# Altium PCB JWpulsegen-V2.PcbDoc
Units mm, origin at the board's own origin, x right, y up, seen from the top; angles counter-clockwise.
Board outline 66.14 x 42.58 mm, 2 copper layers (Top Layer, Bottom Layer), stack 1.646 mm thick; 26 components, 13 nets, 68 pads, 168 vias.
Unrouted connection lines stored in the file: 163.
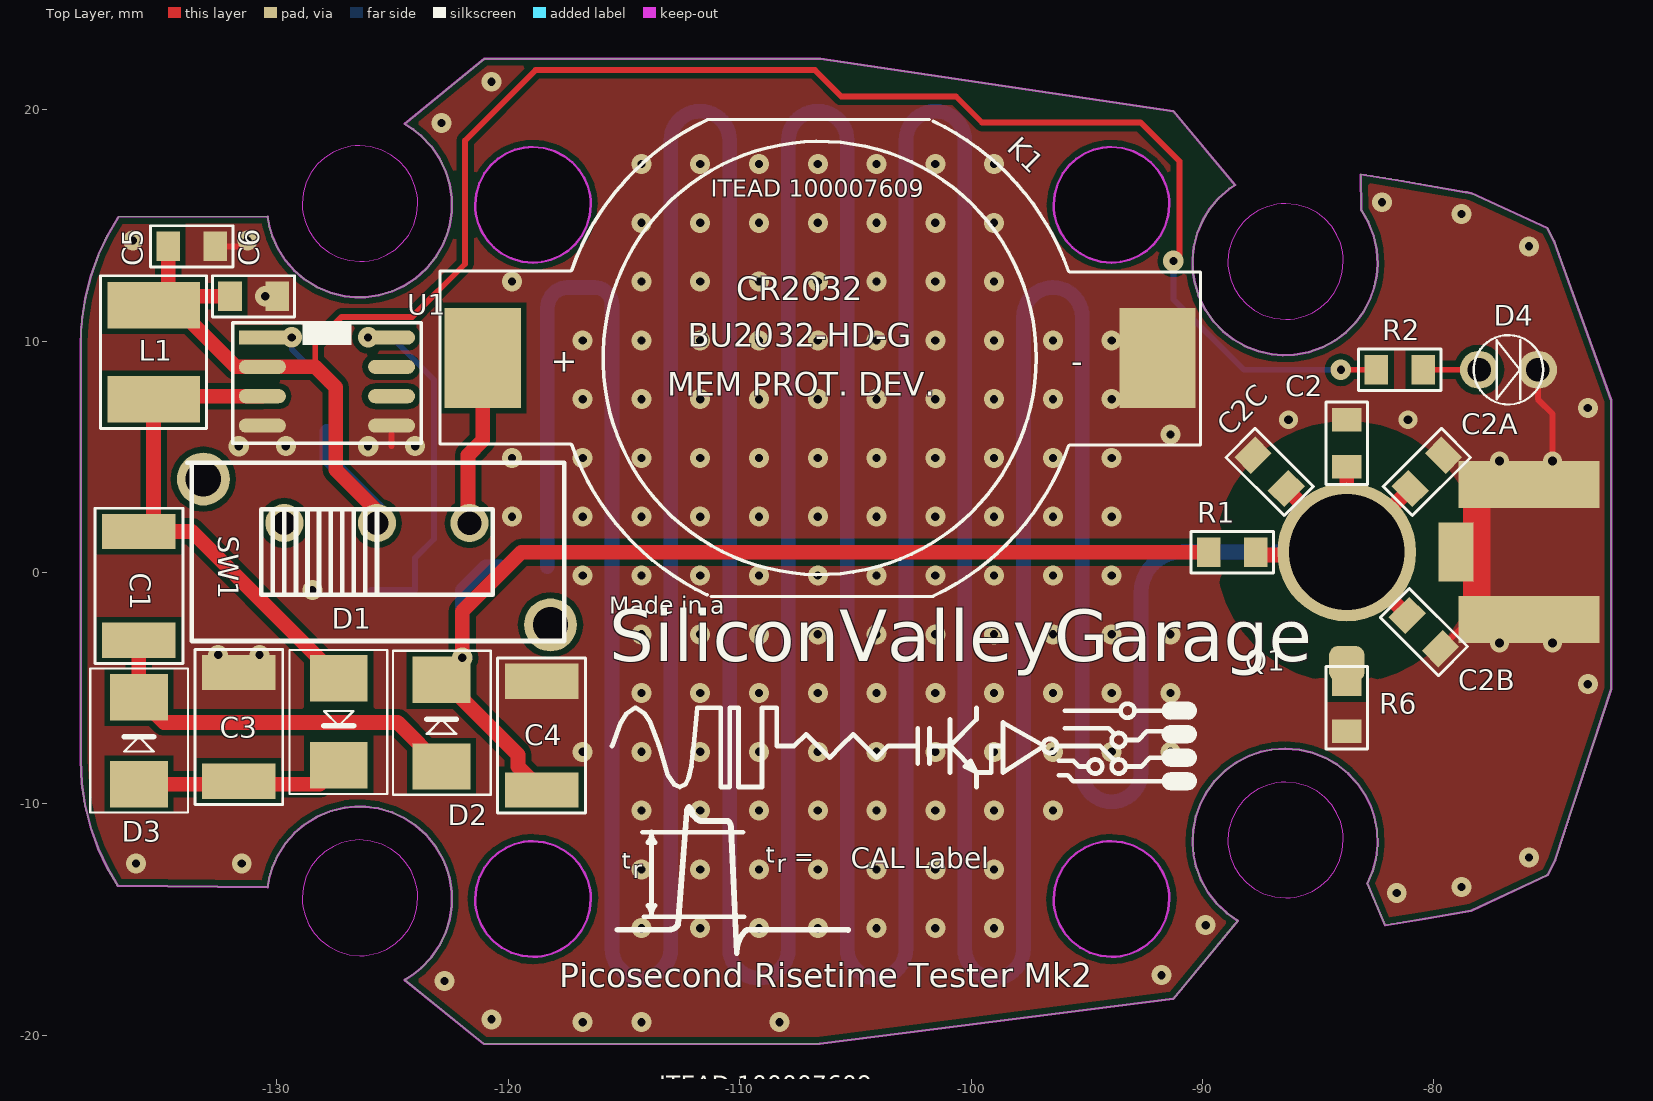
[diagram p0: Top Layer view]
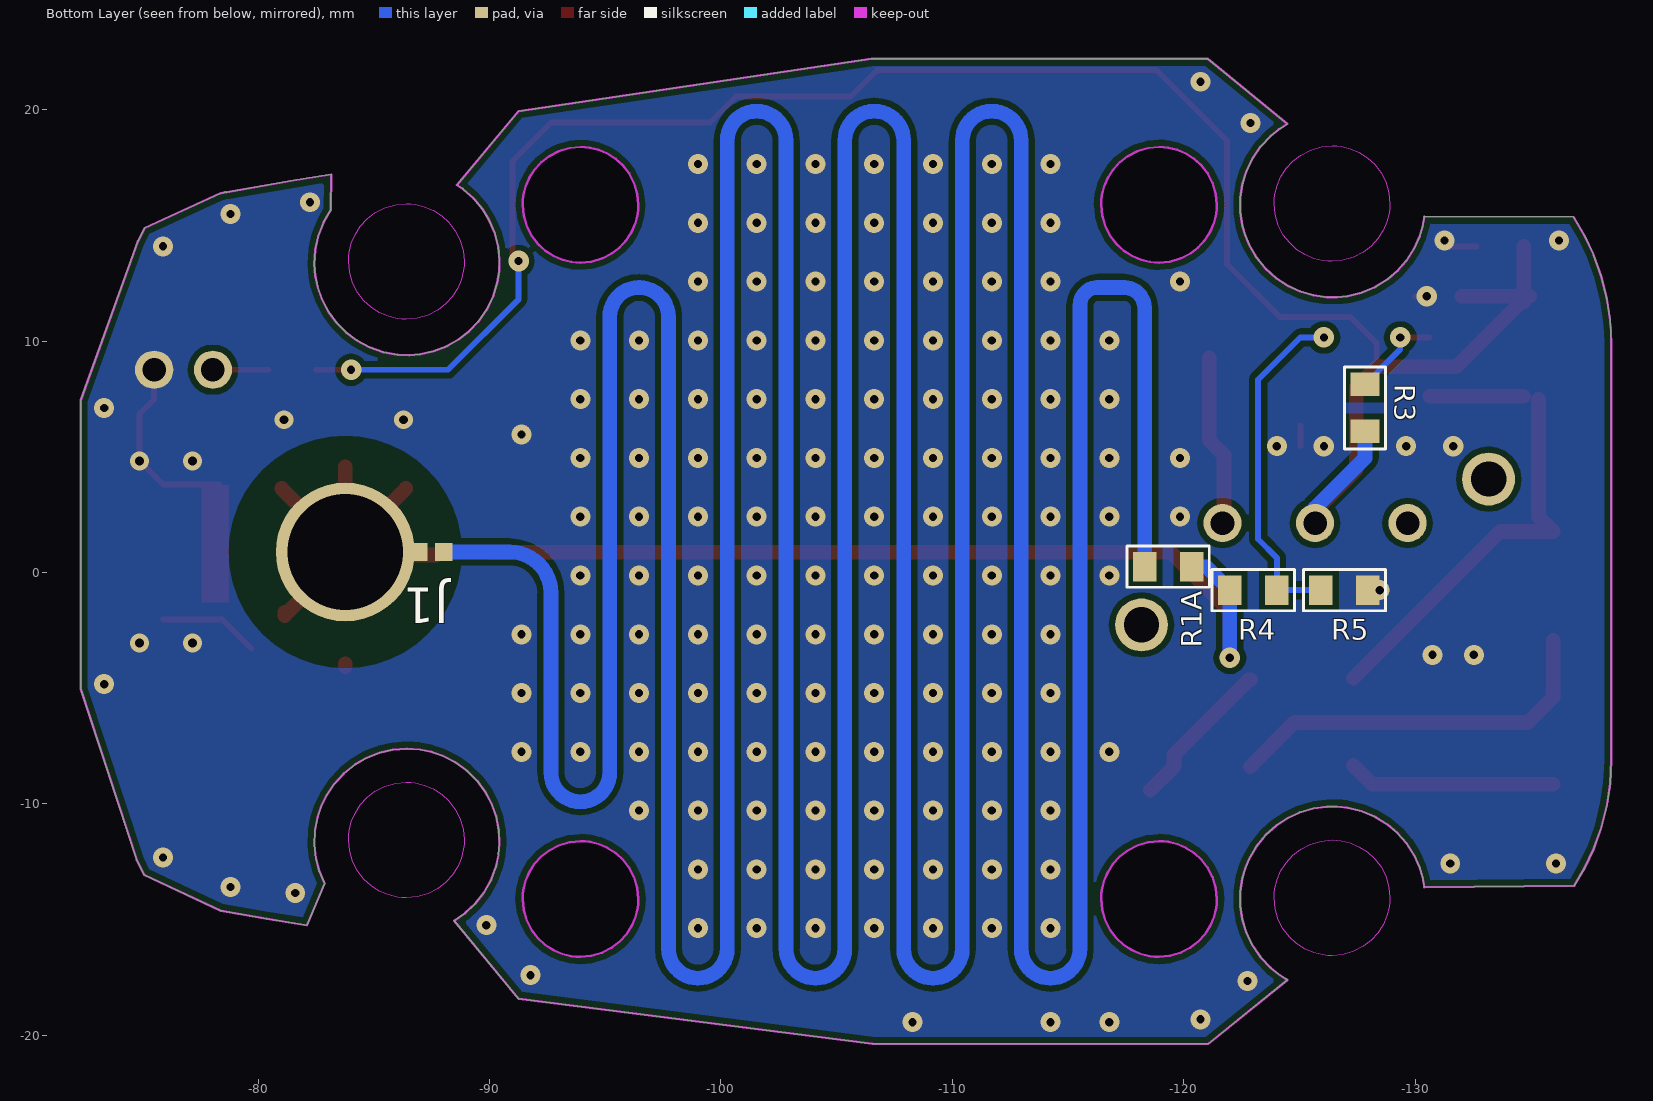
[diagram p1: Bottom Layer view, seen from below]

## Layer stack, top to bottom
Top Solder: solder mask 0.0102, Solder Resist, Dk 3.5
Top Layer: signal copper 0.0356
Dielectric1: core 1.5748, FR-4, Dk 4.8
Bottom Layer: signal copper 0.0356
Bottom Solder: solder mask 0.0102, Solder Resist, Dk 3.5

## Board outline
-124.485,-17.6 -124.116,-17.366 -123.765,-17.085 -123.332,-16.63 -122.973,-16.109 -122.699,-15.533 -122.533,-14.982 -122.448,-14.408 -122.448,-13.8 -122.536,-13.22 -122.656,-12.801 -122.827,-12.384 -123.141,-11.84 -123.54,-11.349 -124.015,-10.924 -124.498,-10.609 -125.023,-10.366 -125.608,-10.195 -126.188,-10.115 -126.625,-10.112 -127.072,-10.159 -127.683,-10.307 -128.267,-10.551 -128.808,-10.887 -129.247,-11.261 -129.628,-11.697 -129.957,-12.21 -130.197,-12.745 -130.323,-13.162 -130.404,-13.605 -136.876,-13.537 -137.333,-12.756 -137.718,-11.936 -138.056,-10.989 -138.297,-10.015 -138.429,-9.115 -138.48,-8.109 -138.48,9.894 -138.466,10.406 -138.426,10.918 -138.291,11.819 -138.047,12.8 -137.71,13.741 -137.325,14.556 -136.866,15.337 -136.844,15.367 -130.404,15.389 -130.323,14.947 -130.197,14.529 -129.957,13.994 -129.628,13.482 -129.247,13.046 -128.808,12.672 -128.267,12.336 -127.683,12.092 -127.072,11.943 -126.625,11.897 -126.189,11.9 -125.608,11.979 -125.024,12.15 -124.498,12.393 -124.015,12.708 -123.54,13.133 -123.141,13.624 -122.827,14.169 -122.656,14.585 -122.536,15.004 -122.448,15.584 -122.448,16.193 -122.533,16.766 -122.699,17.318 -122.973,17.893 -123.331,18.414 -123.765,18.87 -124.116,19.151 -124.485,19.384 -121.031,22.205 -106.51,22.199 -91.262,19.939 -88.595,16.745 -88.854,16.579 -89.328,16.156 -89.694,15.713 -89.995,15.219 -90.222,14.684 -90.375,14.089 -90.435,13.503 -90.419,13.023 -90.342,12.53 -90.159,11.93 -89.883,11.362 -89.518,10.842 -89.12,10.427 -88.665,10.071 -88.16,9.783 -87.586,9.561 -87.012,9.434 -86.533,9.393 -86.034,9.413 -85.417,9.524 -84.821,9.733 -84.262,10.035 -83.803,10.381 -83.397,10.792 -83.052,11.26 -82.765,11.804 -82.572,12.36 -82.476,12.831 -82.437,13.328 -82.476,13.955 -82.614,14.571 -82.849,15.161 -83.139,15.657 -83.163,17.204 -81.419,16.921 -78.636,16.44 -78.567,16.428 -78.499,16.415 -78.39,16.396 -75.103,14.888 -74.809,14.315 -72.339,7.445 -72.339,-5.027 -74.767,-12.43 -75.08,-13.064 -78.39,-14.611 -78.458,-14.623 -78.526,-14.636 -78.636,-14.655 -80.374,-14.96 -82.116,-15.251 -82.877,-13.433 -82.652,-12.903 -82.505,-12.344 -82.439,-11.767 -82.462,-11.152 -82.572,-10.574 -82.724,-10.118 -82.938,-9.667 -83.285,-9.144 -83.712,-8.679 -84.21,-8.285 -84.709,-8 -85.247,-7.789 -85.813,-7.657 -86.426,-7.608 -87.013,-7.65 -87.484,-7.747 -87.956,-7.908 -88.516,-8.191 -89.028,-8.561 -89.477,-9.01 -89.819,-9.472 -90.091,-9.982 -90.288,-10.529 -90.408,-11.133 -90.435,-11.72 -90.392,-12.199 -90.288,-12.687 -90.072,-13.276 -89.764,-13.827 -89.371,-14.326 -88.951,-14.719 -88.476,-15.049 -91.262,-18.415 -106.541,-20.359 -121.056,-20.371
cut-out: -93.936,13.392 -93.742,13.4 -93.543,13.423 -93.156,13.517 -92.775,13.678 -92.417,13.907 -92.1,14.196 -91.837,14.534 -91.622,14.948 -91.48,15.425 -91.436,15.892 -91.444,16.087 -91.467,16.285 -91.561,16.673 -91.722,17.054 -91.951,17.412 -92.24,17.729 -92.578,17.991 -92.992,18.207 -93.469,18.348 -93.936,18.392 -94.131,18.385 -94.329,18.361 -94.717,18.267 -95.098,18.106 -95.456,17.878 -95.773,17.588 -96.035,17.25 -96.251,16.837 -96.392,16.359 -96.436,15.892 -96.429,15.698 -96.405,15.499 -96.311,15.112 -96.15,14.731 -95.922,14.373 -95.632,14.056 -95.294,13.793 -94.881,13.578 -94.403,13.436
cut-out: -118.936,13.392 -118.742,13.4 -118.543,13.423 -118.156,13.517 -117.775,13.678 -117.417,13.907 -117.1,14.196 -116.837,14.534 -116.622,14.948 -116.48,15.425 -116.436,15.892 -116.444,16.087 -116.467,16.285 -116.561,16.673 -116.722,17.054 -116.951,17.412 -117.24,17.729 -117.578,17.991 -117.992,18.207 -118.469,18.348 -118.936,18.392 -119.131,18.385 -119.329,18.361 -119.717,18.267 -120.098,18.106 -120.456,17.878 -120.773,17.588 -121.035,17.25 -121.251,16.837 -121.392,16.359 -121.436,15.892 -121.429,15.698 -121.405,15.499 -121.311,15.112 -121.15,14.731 -120.922,14.373 -120.632,14.056 -120.294,13.793 -119.881,13.578 -119.403,13.436
cut-out: -118.936,-16.608 -118.742,-16.6 -118.543,-16.577 -118.156,-16.483 -117.775,-16.322 -117.417,-16.093 -117.1,-15.804 -116.837,-15.466 -116.622,-15.052 -116.48,-14.575 -116.436,-14.108 -116.444,-13.913 -116.467,-13.715 -116.561,-13.327 -116.722,-12.946 -116.951,-12.588 -117.24,-12.271 -117.578,-12.009 -117.992,-11.793 -118.469,-11.652 -118.936,-11.608 -119.131,-11.615 -119.329,-11.639 -119.717,-11.733 -120.098,-11.894 -120.456,-12.122 -120.773,-12.412 -121.035,-12.75 -121.251,-13.163 -121.392,-13.641 -121.436,-14.108 -121.429,-14.302 -121.405,-14.501 -121.311,-14.888 -121.15,-15.269 -120.922,-15.627 -120.632,-15.944 -120.294,-16.207 -119.881,-16.422 -119.403,-16.564
cut-out: -93.936,-16.608 -93.742,-16.6 -93.543,-16.577 -93.156,-16.483 -92.775,-16.322 -92.417,-16.093 -92.1,-15.804 -91.837,-15.466 -91.622,-15.052 -91.48,-14.575 -91.436,-14.108 -91.444,-13.913 -91.467,-13.715 -91.561,-13.327 -91.722,-12.946 -91.951,-12.588 -92.24,-12.271 -92.578,-12.009 -92.992,-11.793 -93.469,-11.652 -93.936,-11.608 -94.131,-11.615 -94.329,-11.639 -94.717,-11.733 -95.098,-11.894 -95.456,-12.122 -95.773,-12.412 -96.035,-12.75 -96.251,-13.163 -96.392,-13.641 -96.436,-14.108 -96.429,-14.302 -96.405,-14.501 -96.311,-14.888 -96.15,-15.269 -95.922,-15.627 -95.632,-15.944 -95.294,-16.207 -94.881,-16.422 -94.403,-16.564
cut-out: -86.411,-14.057 -86.217,-14.049 -86.018,-14.026 -85.631,-13.932 -85.25,-13.771 -84.892,-13.542 -84.574,-13.253 -84.312,-12.915 -84.096,-12.501 -83.955,-12.024 -83.911,-11.557 -83.919,-11.363 -83.942,-11.164 -84.036,-10.777 -84.197,-10.395 -84.426,-10.038 -84.715,-9.72 -85.053,-9.458 -85.467,-9.242 -85.944,-9.101 -86.411,-9.057 -86.606,-9.064 -86.804,-9.088 -87.191,-9.182 -87.573,-9.343 -87.931,-9.572 -88.248,-9.861 -88.51,-10.199 -88.726,-10.612 -88.867,-11.09 -88.911,-11.557 -88.904,-11.751 -88.88,-11.95 -88.786,-12.337 -88.625,-12.718 -88.396,-13.076 -88.107,-13.394 -87.769,-13.656 -87.356,-13.872 -86.878,-14.013
cut-out: -126.411,13.443 -126.217,13.451 -126.018,13.474 -125.631,13.568 -125.25,13.729 -124.892,13.958 -124.574,14.247 -124.312,14.585 -124.096,14.999 -123.955,15.476 -123.911,15.943 -123.919,16.137 -123.942,16.336 -124.036,16.723 -124.197,17.105 -124.426,17.462 -124.715,17.78 -125.053,18.042 -125.467,18.258 -125.944,18.399 -126.411,18.443 -126.606,18.436 -126.804,18.412 -127.191,18.318 -127.573,18.157 -127.931,17.928 -128.248,17.639 -128.51,17.301 -128.726,16.888 -128.867,16.41 -128.911,15.943 -128.904,15.749 -128.88,15.55 -128.786,15.163 -128.625,14.782 -128.396,14.424 -128.107,14.106 -127.769,13.844 -127.356,13.628 -126.878,13.487
cut-out: -86.411,10.943 -86.217,10.951 -86.018,10.974 -85.631,11.068 -85.25,11.229 -84.892,11.458 -84.574,11.747 -84.312,12.085 -84.096,12.499 -83.955,12.976 -83.911,13.443 -83.919,13.637 -83.942,13.836 -84.036,14.223 -84.197,14.605 -84.426,14.963 -84.715,15.28 -85.053,15.542 -85.467,15.758 -85.944,15.899 -86.411,15.943 -86.606,15.936 -86.804,15.912 -87.191,15.818 -87.573,15.657 -87.931,15.428 -88.248,15.139 -88.51,14.801 -88.726,14.388 -88.867,13.91 -88.911,13.443 -88.904,13.249 -88.88,13.05 -88.786,12.663 -88.625,12.282 -88.396,11.924 -88.107,11.606 -87.769,11.344 -87.356,11.128 -86.878,10.987
cut-out: -126.411,-16.557 -126.217,-16.549 -126.018,-16.526 -125.631,-16.432 -125.25,-16.271 -124.892,-16.042 -124.574,-15.753 -124.312,-15.415 -124.096,-15.001 -123.955,-14.524 -123.911,-14.057 -123.919,-13.863 -123.942,-13.664 -124.036,-13.277 -124.197,-12.895 -124.426,-12.538 -124.715,-12.22 -125.053,-11.958 -125.467,-11.742 -125.944,-11.601 -126.411,-11.557 -126.606,-11.564 -126.804,-11.588 -127.191,-11.682 -127.573,-11.843 -127.931,-12.072 -128.248,-12.361 -128.51,-12.699 -128.726,-13.112 -128.867,-13.59 -128.911,-14.057 -128.904,-14.251 -128.88,-14.45 -128.786,-14.837 -128.625,-15.218 -128.396,-15.576 -128.107,-15.894 -127.769,-16.156 -127.356,-16.372 -126.878,-16.513

## Design rules (kind name [scope] priority, off if disabled: settings)
AssemblyTestPointUsage [All] p1 off:
AssemblyTestpoint [All] p1 off: testpointundercomponent=TRUE minsize=1.016 maxsize=2.54 preferedsize=1.524 minholesize=0 maxholesize=1.016 preferedholesize=0.813 testpointgrid=0.025 usegrid=TRUE gridtolerance=0 allowsidetop=TRUE allowsidebottom=TRUE
Clearance Clearance_2 [All] p1: gap=0.254 ignorepadtopadclearanceinfootprint=FALSE
Clearance Clearance_1 [InPolygon] p2: gap=0.203 ignorepadtopadclearanceinfootprint=FALSE
Clearance waveguide [InNet('NetC1_1') vs InNet('GND')] p3: gap=0.203 ignorepadtopadclearanceinfootprint=FALSE
ComponentClearance [All] p1 off: gap=0.254 collisioncheckmode=3 verticalgap=0.254 showdistances=FALSE
DiffPairsRouting [All] p1 off: maxlimit=0.254 minlimit=0.254 mostfreqgap=0.254 toplayer_minwidth=0.381 toplayer_maxwidth=0.381 toplayer_prefwidth=0.381 bottomlayer_minwidth=0.381 bottomlayer_maxwidth=0.381 bottomlayer_prefwidth=0.381 maxuncoupledlength=12.7
FabricationTestPointUsage [All] p1 off: valid=0 allowmultiple=FALSE
FabricationTestpoint [All] p1 off: side=3 testpointundercomponent=TRUE minsize=1.016 maxsize=2.54 preferedsize=1.524 minholesize=0 maxholesize=1.016 preferedholesize=0.813 testpointgrid=0.025 allowsidetop=TRUE allowsidebottom=TRUE usegrid=TRUE gridtolerance=0
FanoutControl Fanout_BGA [IsBGA] p1 off: bgadir=Out bgaviamode=Centered fanoutstyle=Auto fanoutdirection=Alternating viagrid=0.025 // Fanout_BGA (Default Rule)
FanoutControl Fanout_LCC [IsLCC] p2 off: bgadir=Out bgaviamode=Centered fanoutstyle=Auto fanoutdirection=Alternating viagrid=0.025 // Fanout_LCC (Default Rule)
FanoutControl Fanout_SOIC [IsSOIC] p3 off: bgadir=Out bgaviamode=Centered fanoutstyle=Auto fanoutdirection=Alternating viagrid=0.025 // Fanout_SOIC (Default Rule)
FanoutControl Fanout_Small [(CompPinCount < 5)] p4 off: bgadir=Out bgaviamode=Centered fanoutstyle=Auto fanoutdirection=OutThenIn viagrid=0.025 // Fanout_Small (Default Rule)
FanoutControl Fanout_Default [All] p5 off: bgadir=Out bgaviamode=Centered fanoutstyle=Auto fanoutdirection=Alternating viagrid=0.025 // Fanout_Default (Default Rule)
Height [All] p1 off: minheight=0 maxheight=25.4 prefheight=12.7
HoleSize [All] p1 off: absolutevalues=TRUE maxlimit=2.54 minlimit=0.025 maxpercent=80.000 minpercent=20.000
HoleToHoleClearance [All] p1 off: gap=0.254 allowstackedmicrovias=TRUE
LayerPairs [All] p1 off: enforce=TRUE
MinimumSolderMaskSliver [All] p1 off: minsoldermaskwidth=0.254
NetAntennae [All] p1 off: netantennaetolerance=0
PasteMaskExpansion [All] p1 off: expansion=0
PlaneClearance [All] p1 off: clearance=0.508
PlaneConnect [All] p1 off: planeconnectstyle=Relief reliefexpansion=0.508 reliefentries=4 reliefconductorwidth=0.254 reliefairgap=0.254
PolygonConnect [All] p1: connectstyle=Direct reliefconductorwidth=0.254 reliefentries=4 polygonreliefangle="90 Angle" airgapwidth=0.254
RoutingCorners [All] p1 off: cornerstyle=45-Degree minsetback=2.54 maxsetback=2.54
RoutingLayers [All] p1 off: top layer_v5=TRUE bottom layer_v5=TRUE
RoutingPriority [All] p1 off: routingpriority=0
RoutingTopology [All] p1 off: topology=Shortest
RoutingVias [All] p1: holewidth=0.356 width=0.889 viastyle="Through Hole" minholewidth=0.356 minwidth=0.889 maxholewidth=0.711 maxwidth=1.27
SilkToSilkClearance [All] p1 off: silktosilkclearance=0.254
SilkToSolderMaskClearance SilkscreenOverComponentPads [IsPad] p1 off: minsilkscreentomaskgap=0.254 clearancetoexposedcopper=TRUE
SolderMaskExpansion [All] p1 off: expansion=0.102 istentingtop=FALSE
Width [All] p1: maxlimit=2.54 minlimit=0.254 preferedwidth=0.254 minimp=50.000000 maximp=50.000000 favimp=50.000000
4 further rules are at their usual default settings.

## Components (designator, comment, footprint, x,y, rotation, side; value= is the part's Value field where it differs from the comment)
C1 "470nF" 1812C-GENERIC -135.966,1.778 r270 top
C2 "2pF" 0805C-GENERIC -83.769,4.826 r90 top
C2A "2pF" 0805C-GENERIC -80.848,3.81 r45 top
C2B "2pF" 0805C-GENERIC -80.975,-2.032 r315 top
C2C "2pF" 0805C-GENERIC -86.563,3.81 r135 top
C3 "470nF" 1812C-GENERIC -131.648,-4.318 r270 top
C4 "470nF" 1812C-GENERIC -118.567,-4.699 r270 top
C5 "10uF" 0805C-GENERIC -134.442,14.097 r0 top
C6 "10uF" 0805C-GENERIC -131.775,11.938 r0 top
D1 "MURS120" DIODE-SMB -127.33,-4.572 r90 top
D2 "MURS120" DIODE-SMB -122.885,-8.382 r270 top
D3 "MURS120" DIODE-SMB -135.966,-9.144 r270 top
D4 "LED-YELLOW-3MM" LED-3MM-YELLOW -78.054,8.763 r0 top
J1 "BYPASS" BYPASS -88.413,0.889 r0 bottom
K1 "3V-CR2023" BATCLIP-CR2032 -121.107,9.271 r0 top
L1 "150uH" TOKO-NR4018 -135.331,11.557 r270 top
Q1 "2N2369-JW" JW2N2369 -81.991,0 r0 top
R1 "10M" 0805R-TBD -89.477,0.876 r0 top
R1A "10M" 0805R-TBD -120.091,0.254 r0 bottom
R2 "220R" 0805R-220 -82.245,8.763 r0 top
R3 "220R" 0805R-220 -127.838,6.35 r90 bottom
R4 "10M" 0805R-TBD -122.25,-0.762 r180 bottom
R5 "10K" 0805R-10K -125.933,-0.762 r180 bottom
R6 "10K" 0805R-10K -83.769,-4.826 r270 top
SW1 "SW-MHS122K" MHS122K -125.679,0.889 r180 top
U1 "LT1073" SO8 -130.632,10.16 r0 top

## Footprints (in the part's own frame and the unit in brackets; to place one, negate y for a bottom-side part, rotate by r counter-clockwise, add the part's x,y. Pads: shape width x height; smd on the part's side, far side on the other; paste and mask are expansions set on the pad)
0805C-GENERIC [mil] "CAPACITOR 0805"
  rect 40x50 smd: 1(-10,0) 2(70,0)
  silkscreen extent -40,-35 100,35, body extent -11,-25 70,25, height 26
0805R-10K [mil] "RESISTOR 0805"
  rect 40x50 smd: 1(0,0) 2(80,0)
  silkscreen extent -30,-35 110,35, body extent -1,-25 80,25, height 27
0805R-220 [mil] "RESISTOR 0805"
  rect 40x50 smd: 1(-10,0) 2(70,0)
  silkscreen extent -40,-35 100,35, body extent -11,-25 70,25, height 27
0805R-TBD [mil] "RESISTOR 0805 VALUE TO BE DETERMINED"
  rect 40x50 smd: 1(-10,0) 2(70,0)
  silkscreen extent -40,-35 100,35, body extent -11,-25 70,25, height 27
1812C-GENERIC [mil]
  rect 60x125 smd: 1(0,0) 2(185,0)
  silkscreen extent -39,-75 224,75, body extent 2,-63 179,63, height 63
BATCLIP-CR2032 [mil] "BATTERY CLIP 2032 SMD BU2032SM-HD-G"
  rect 130x170 smd mask+2: +(0,0) -(1148,0)
  silkscreen extent -73,-406 1221,406, body extent -56,-393 1204,397, height 209
BYPASS [mil] "SOLDERDOT BYPASS"
  rect 30x30 smd paste-300: 1(15,0)
  rect 30x30 smd paste-30: 2(57.86,0)
DIODE-SMB [mm]
  rect 2x2.5 smd: A(0,0) K(-3.75,0)
  silkscreen extent -5,-2.1 1.22,2.12, body extent -4.57,-1.95 0.8,2, height 2.23
JW2N2369 [mil]
  rrect50% 60x60 smd mask+2: B(-70,-155)
  round 236.22 hole 196.85 mask+2: C(-70,35)
  rect 60x100 smd mask+2: G(116,35)
  body extent -218,-165 215,209, height 140
LED-3MM-YELLOW [mil]
  round 65 hole 40: A(0,0) K(100,0)
  silkscreen extent -9,-59 109,59, body extent -15,-63 114,67, height 250
MHS122K [mil]
  round 65 hole 40: C(0,-49.21) NC(157.48,-49.21) NO(-157.48,-49.21)
  round 90 hole 60: M1(295.28,-124.02) M2(-295.28,124.02)
  silkscreen extent -319,-152 323,152, body extent -323,-132 323,134, height 430
SO8 [mil]
  rect 80x24 smd: 1(0,0)
  oval 80x24 smd: 2(0,-50) 3(0,-100) 4(0,-150) 5(220,-150) 6(220,-100) 7(220,-50) 8(220,0)
  silkscreen extent -50,-180 270,25, body extent -18,-170 242,22, height 61
TOKO-NR4018 [mm] "TOKO INDUCTOR NR4018 SERIES"
  rect 2x4 smd mask+0.051: 1(0,0) 2(4.064,0)
  silkscreen extent -1.27,-2.29 5.33,2.29, body extent 0,-2.03 4.06,2.03, height 1.8

## Part data
C1 C3 C4: library part 1812C-470nF-250V-X7R-MUR, "CAPACITOR 1812 CERAMIC"
C2 C2A C2B C2C C5 C6: library part 0805C-10UF-6V3-X5R-PAN, "CAPACITOR 0805 CERAMIC"
D1 D2 D3: "DIODE"
J1: "SOLDERDOT BYPASS"
K1: library part BATCLIP-CR2032-SMD, "BU2032SM-HD-G"
L1: library part 150U-NR4018-TOKO
R1 R1A R4: library part 0805R-10M, "RESISTOR 0805 VALUE TO BE DETERMINED"
R2 R3: library part 0805R-220R, "RESISTOR 0805 1/4 WATT THIN FILM"
R5 R6: library part 0805R-10K, "RESISTOR 0805 1/4 WATT THIN FILM"
SW1: "SWITCH DPDT"

## Free pads (board coordinates)
  round 5 on Mech1 mask+0.051: 0(-118.948,-14.122) 1(-93.929,-14.097) 2(-93.929,15.9) 3(-118.948,15.9)
  rect 6.096x2.032 smd mask+0.051: 2(-75.895,-2.032) 2(-75.895,3.81)

## Via types
v1: diameter 0.864, hole 0.356, Top Layer to Bottom Layer, 154 vias
v2: diameter 0.889, hole 0.356, Top Layer to Bottom Layer, 8 vias
v3: diameter 0.813, hole 0.381, Top Layer to Bottom Layer, 6 vias

## Nets (pads, with @x,y where several pads share a name; then routed paths per layer and width w, separated by ;. In a path a pad name is that pad's centre, name@x,y a point inside that pad or via, vN(x,y) a via of type N, cw(c..) or ccw(c..) an arc to the next point about the centre after c; other vN are vias at no path point)
GND: C2.2 C2A.2 C2B.2 C2C.2 C3.1 C4.1 C5.2 C6.2 D4.K K1.- pad.2@-75.895,3.81 pad.2@-75.895,-2.032 Q1.G R5.2 R6.2 U1.4 U1.5 | length 15.3
  Top Layer w0.254: C5.2 -131.521,14.097 v1(-131.267,14.351) ; v2(-130.505,11.938) C6.2 ; -125.044,5.461 U1.5 ; C2B.2 -78.46,-2.032 pad.2@-75.895,-2.032 ; pad.2@-78.333,3.81 -75.895,3.81 v3(-74.879,4.826) -74.879,6.858 -75.514,7.493 D4.K
  other v1: -116.789,-19.431 -114.249,-19.431 -108.28,-19.431 -120.726,-19.304 -122.758,-17.653 -91.77,-17.399 -114.249,-15.367 -111.709,-15.367 -109.169,-15.367 -106.629,-15.367 -104.089,-15.367 -101.549,-15.367 -99.009,-15.367 -89.865,-15.24 -81.61,-13.843 -78.816,-13.589 -114.249,-12.827 -111.709,-12.827 -109.169,-12.827 -106.629,-12.827 -104.089,-12.827 -101.549,-12.827 -99.009,-12.827 -136.093,-12.573 -131.521,-12.573 -75.895,-12.319 -114.249,-10.287 -111.709,-10.287 -109.169,-10.287 -106.629,-10.287 -104.089,-10.287 -101.549,-10.287 -99.009,-10.287 -96.469,-10.287 -116.786,-7.747 -114.249,-7.747 -111.709,-7.747 -109.169,-7.747 -106.629,-7.747 -104.089,-7.747 -101.549,-7.747 -99.009,-7.747 -96.469,-7.747 -93.929,-7.747 -91.389,-7.747 -114.249,-5.207 -111.709,-5.207 -109.169,-5.207 -106.629,-5.207 -104.089,-5.207 -101.549,-5.207 -99.009,-5.207 -96.469,-5.207 -93.929,-5.207 -91.389,-5.207 -73.355,-4.826 -132.537,-3.556 -130.759,-3.556 -114.249,-2.667 -111.709,-2.667 -109.169,-2.667 -106.629,-2.667 -104.089,-2.667 -101.549,-2.667 -99.009,-2.667 -96.469,-2.667 -93.929,-2.667 -91.389,-2.667 -128.473,-0.762 -116.786,-0.127 -114.249,-0.127 -111.709,-0.127 -109.169,-0.127 -106.629,-0.127 -104.089,-0.127 -101.549,-0.127 -99.009,-0.127 -96.469,-0.127 -93.929,-0.127 -119.837,2.413 -116.786,2.413 -114.249,2.413 -111.709,2.413 -109.169,2.413 -106.629,2.413 -104.089,2.413 -101.549,2.413 -99.009,2.413 -96.469,2.413 -93.929,2.413 -119.837,4.953 -116.786,4.953 -114.249,4.953 -111.709,4.953 -109.169,4.953 -106.629,4.953 -104.089,4.953 -101.549,4.953 -99.009,4.953 -96.469,4.953 -93.929,4.953 -129.616,5.461 -124.028,5.461 -91.389,5.969 -73.355,7.112 -116.786,7.493 -114.249,7.493 -111.709,7.493 -109.169,7.493 -106.629,7.493 -104.089,7.493 -101.549,7.493 -99.009,7.493 -96.469,7.493 -93.929,7.493 -116.786,10.033 -114.249,10.033 -111.709,10.033 -109.169,10.033 -106.629,10.033 -104.089,10.033 -101.549,10.033 -99.009,10.033 -96.469,10.033 -93.929,10.033 -119.837,12.573 -114.249,12.573 -111.709,12.573 -109.169,12.573 -106.629,12.573 -104.089,12.573 -101.549,12.573 -99.009,12.573 -75.895,14.097 -136.22,14.351 -114.249,15.113 -111.709,15.113 -109.169,15.113 -106.629,15.113 -104.089,15.113 -101.549,15.113 -99.009,15.113 -78.816,15.494 -82.245,16.002 -114.249,17.653 -111.709,17.653 -109.169,17.653 -106.629,17.653 -104.089,17.653 -101.549,17.653 -99.009,17.653 -122.885,19.431 -120.726,21.209
  other v2: -131.648,5.461 -126.06,5.461
  other v3: -77.165,-3.048 -74.879,-3.048 -77.165,4.826 -86.283,6.604 -81.127,6.604
NetC1_1: C1.1 D1.A L1.2 U1.3 | length 21.3
  Top Layer w0.635: L1.2 -135.331,2.413 C1.1 -133.68,1.778 D1.A ; L1.2@-134.696,7.62 U1.3
NetC1_2: C1.2 D2.A D3.K | length 16.8
  Top Layer w0.635: C1.2 D3.K -134.883,-6.477 -124.79,-6.477 D2.A
NetC2_1: C2.1 C2A.1 C2B.1 C2C.1 J1.2 Q1.C R1.2 | length 22.1
  Top Layer w0.635: R1.2@-87.699,0.762 -83.769,0.762 C2B.1 C2B.1@-81.154,-1.725 ; C2C.1 Q1.C@-83.769,1.016 ; C2.1 Q1.C@-83.769,1.016 ; C2A.1 Q1.C Q1.C@-83.769,1.016
  Bottom Layer w0.635: J1.2@-86.829,0.889 Q1.C
NetC3_2: C3.2 D1.K D3.A | length 9
  Top Layer w0.635: D3.A -128.152,-9.144 D1.K
NetC4_2: C4.2 D2.K R1.1 R1A.1 R4.1 | length 46.8
  Top Layer w0.635: D2.K -122.825,-4.632 -119.583,-7.874 -119.583,-8.382 C4.2 ; v2(-121.996,-3.683) -121.996,-1.675 -119.445,0.876 R1.1@-90.069,0.876
  Bottom Layer w0.635: v2(-121.996,-3.683) -121.869,-3.683 -121.996,-3.556 R4.1 -120.98,0.254 R1A.1
NetD4_A: D4.A R2.2 | length 2.4
  Top Layer w0.254: R2.2 D4.A
NetK1_+: K1.+ SW1.NO | length 7.4
  Top Layer w0.635: SW1.NO -121.742,2.202 -121.742,5.08 -121.107,5.715 K1.+
NetQ1_B: Q1.B R6.1 | length 0.1
  Top Layer w0.635: Q1.B@-83.769,-4.064 Q1.B
NetR3_2: R3.2 U1.1 | length 3.9
  Top Layer w0.254: U1.1 v2(-129.362,10.16)
  Bottom Layer w0.254: v2(-129.362,10.16) -129.362,9.652 R3.2
NetR4_2: R4.2 R5.1 U1.8 | length 14.9
  Bottom Layer w0.254: v2(-126.06,10.16) -125.044,10.16 -123.215,8.331 -123.215,1.448 -124.028,0.635 R4.2 R5.1
V3: C5.1 C6.1 L1.1 R2.1 R3.1 SW1.C U1.2 | length 89.3
  Top Layer w0.254: -128.346,8.89 -128.346,9.906 -127.203,11.049 -124.155,11.049 -121.873,13.331 -121.873,18.665 -118.821,21.717 -106.756,21.717 -105.613,20.574 -100.66,20.574 -99.533,19.447 -92.675,19.447 -91,17.772 -91,13.724 v2(-91.262,13.462) ; v2(-84.023,8.763) R2.1
  Top Layer w0.635: L1.1@-134.95,11.938 L1.1@-134.696,11.938 ; L1.1@-134.696,11.684 L1.1@-134.696,11.938 ; C5.1 L1.1@-134.696,11.938 ; L1.1@-134.442,11.557 -131.775,8.89 U1.2 -128.346,8.89 -127.464,8.009 -127.464,4.452 -125.679,2.667 SW1.C ; C6.1 L1.1@-134.696,11.938
  Bottom Layer w0.254: v2(-91.262,13.462) -91.262,11.811 -88.214,8.763 v2(-84.023,8.763)
  Bottom Layer w0.635: R3.1 -127.838,4.953 -125.679,2.794 SW1.C
WAVEGUIDE: J1.1 R1A.2 | length 696.8
  Bottom Layer w0.635: -118.313,11.43 cw(c-117.424,11.43) -117.424,12.319 ; -118.313,11.43 cw(c-117.424,11.43) -117.424,12.319 ; -118.313,11.43 R1A.2 -118.313,11.43 ; -117.424,12.319 -116.281,12.319 ; -117.424,12.319 -116.281,12.319 ; -116.281,12.319 cw(c-116.281,11.557) -115.519,11.557 ; -116.281,12.319 cw(c-116.281,11.557) -115.519,11.557 ; -115.519,-16.256 ccw(c-114.249,-16.256) -114.249,-17.526 ; -115.519,-16.256 ccw(c-114.249,-16.256) -114.249,-17.526 ; -115.519,-16.256 -115.519,11.557 ; -115.519,-16.256 -115.519,11.557 ; -114.249,-17.526 ccw(c-114.249,-16.256) -112.979,-16.256 ; -114.249,-17.526 ccw(c-114.249,-16.256) -112.979,-16.256 ; -112.979,-16.256 -112.979,18.669 ; -112.979,-16.256 -112.979,18.669 ; -112.979,18.669 cw(c-111.709,18.669) -111.709,19.939 ; -112.979,18.669 cw(c-111.709,18.669) -111.709,19.939 ; -111.709,19.939 cw(c-111.709,18.669) -110.439,18.669 ; -111.709,19.939 cw(c-111.709,18.669) -110.439,18.669 ; -110.439,-16.256 ccw(c-109.169,-16.256) -109.169,-17.526 ; -110.439,-16.256 ccw(c-109.169,-16.256) -109.169,-17.526 ; -110.439,-16.256 -110.439,18.669 ; -110.439,-16.256 -110.439,18.669 ; -109.169,-17.526 ccw(c-109.169,-16.256) -107.899,-16.256 ; -109.169,-17.526 ccw(c-109.169,-16.256) -107.899,-16.256 ; -107.899,-16.256 -107.899,18.669 ; -107.899,-16.256 -107.899,18.669 ; -107.899,18.669 cw(c-106.629,18.669) -106.629,19.939 ; -107.899,18.669 cw(c-106.629,18.669) -106.629,19.939 ; -106.629,19.939 cw(c-106.629,18.669) -105.359,18.669 ; -106.629,19.939 cw(c-106.629,18.669) -105.359,18.669 ; -105.359,-16.256 ccw(c-104.089,-16.256) -104.089,-17.526 ; -105.359,-16.256 ccw(c-104.089,-16.256) -104.089,-17.526 ; -105.359,-16.256 -105.359,18.669 ; -105.359,-16.256 -105.359,18.669 ; -104.089,-17.526 ccw(c-104.089,-16.256) -102.819,-16.256 ; -104.089,-17.526 ccw(c-104.089,-16.256) -102.819,-16.256 ; -102.819,-16.256 -102.819,18.669 ; -102.819,-16.256 -102.819,18.669 ; -102.819,18.669 cw(c-101.549,18.669) -101.549,19.939 ; -102.819,18.669 cw(c-101.549,18.669) -101.549,19.939 ; -101.549,19.939 cw(c-101.549,18.669) -100.279,18.669 ; -101.549,19.939 cw(c-101.549,18.669) -100.279,18.669 ; -100.279,-16.256 ccw(c-99.009,-16.256) -99.009,-17.526 ; -100.279,-16.256 ccw(c-99.009,-16.256) -99.009,-17.526 ; -100.279,-16.256 -100.279,18.669 ; -100.279,-16.256 -100.279,18.669 ; -99.009,-17.526 ccw(c-99.009,-16.256) -97.739,-16.256 ; -99.009,-17.526 ccw(c-99.009,-16.256) -97.739,-16.256 ; -97.739,-16.256 -97.739,11.049 ; -97.739,-16.256 -97.739,11.049 ; -97.739,11.049 cw(c-96.469,11.049) -96.469,12.319 ; -97.739,11.049 cw(c-96.469,11.049) -96.469,12.319 ; -96.469,12.319 cw(c-96.469,11.049) -95.199,11.049 ; -96.469,12.319 cw(c-96.469,11.049) -95.199,11.049 ; -95.199,-8.636 ccw(c-93.929,-8.636) -93.929,-9.906 ; -95.199,-8.636 ccw(c-93.929,-8.636) -93.929,-9.906 ; -95.199,-8.636 -95.199,11.049 ; -95.199,-8.636 -95.199,11.049 ; -93.929,-9.906 ccw(c-93.929,-8.636) -92.659,-8.636 ; -93.929,-9.906 ccw(c-93.929,-8.636) -92.659,-8.636 ; -92.659,-8.636 -92.659,-0.889 ; -92.659,-8.636 -92.659,-0.889 ; -92.659,-0.889 cw(c-90.881,-0.889) -90.881,0.889 ; -92.659,-0.889 cw(c-90.881,-0.889) -90.881,0.889 ; -90.881,0.889 -88.214,0.889 -90.881,0.889
pads on no net: SW1.M1 SW1.M2 SW1.NC U1.6 U1.7

## Polygon pours and split planes (outlines as drawn)
GND on Bottom Layer "TOP GND GND" (solid, remove dead copper, pour order 7): -71.259,22.539 -140.474,22.539 -140.474,-21.149 -140.22,-21.403 -75.577,-21.403 -71.005,-16.831
GND on Top Layer "gnd1" (solid, remove dead copper, pour order 5): -141.127,25.317 -141.127,-21.915 -70.596,-21.915 -70.815,1.016 -78.181,1.016 -78.61,2.284 -79.269,3.711 -80.467,4.826 -81.626,5.744 -82.797,6.135 -83.769,6.35 -85.396,6.108 -86.823,5.462 -87.82,4.572 -88.654,3.361 -88.991,2.257 -89.223,0.642 -88.754,-1.116 -87.82,-2.667 -85.912,-4.105 -83.769,-4.572 -81.781,-4.134 -80.096,-3.153 -78.754,-1.288 -78.181,1.016 -70.815,1.016 -70.596,25.317

## Keep-outs
Keep-Out Layer:
  lines w0.102: -138.48,-8.109 -138.48,9.894 -138.466,10.406 -138.426,10.918 -138.291,11.819 -138.047,12.8 -137.71,13.741 -137.325,14.556 -136.866,15.337 -136.844,15.367 -130.404,15.389 -130.323,14.947 -130.197,14.529 -129.957,13.994 -129.628,13.482 -129.247,13.046 -128.808,12.672 -128.267,12.336 -127.683,12.092 -127.072,11.943 -126.625,11.897 -126.189,11.9 -125.608,11.979 -125.024,12.15 -124.498,12.393 -124.015,12.708 -123.54,13.133 -123.141,13.624 -122.827,14.169 -122.656,14.585 -122.536,15.004 -122.448,15.584 -122.448,16.193 -122.533,16.766 -122.699,17.318 -122.973,17.893 -123.331,18.414 -123.765,18.87 -124.116,19.151 -124.485,19.384 -121.031,22.205 -106.51,22.199 -91.262,19.939 -88.595,16.745 -88.854,16.579 -89.328,16.156 -89.694,15.713 -89.995,15.219 -90.222,14.684 -90.375,14.089 -90.435,13.503 -90.419,13.023 -90.342,12.53 -90.159,11.93 -89.883,11.362 -89.518,10.842 -89.12,10.427 -88.665,10.071 -88.16,9.783 -87.586,9.561 -87.012,9.434 -86.533,9.393 -86.034,9.413 -85.417,9.524 -84.821,9.733 -84.262,10.035 -83.803,10.381 -83.397,10.792 -83.052,11.26 -82.765,11.804 -82.572,12.36 -82.476,12.831 -82.437,13.328 -82.476,13.955 -82.614,14.571 -82.849,15.161 -83.139,15.657 -83.163,17.204 -81.419,16.921 -78.636,16.44 -78.567,16.428 -78.499,16.415 -78.39,16.396 -75.103,14.888 -74.809,14.315 -72.339,7.445 -72.339,-5.027 -74.767,-12.43 -75.08,-13.064 -78.39,-14.611 -78.458,-14.623 -78.526,-14.636 -78.636,-14.655 -80.374,-14.96 -82.116,-15.251 -82.877,-13.433 -82.652,-12.903 -82.505,-12.344 -82.439,-11.767 -82.462,-11.152 -82.572,-10.574 -82.724,-10.118 -82.938,-9.667 -83.285,-9.144 -83.712,-8.679 -84.21,-8.285 -84.709,-8 -85.247,-7.789 -85.813,-7.657 -86.426,-7.608 -87.013,-7.65 -87.484,-7.747 -87.956,-7.908 -88.516,-8.191 -89.028,-8.561 -89.477,-9.01 -89.819,-9.472 -90.091,-9.982 -90.288,-10.529 -90.408,-11.133 -90.435,-11.72 -90.392,-12.199 -90.288,-12.687 -90.072,-13.276 -89.764,-13.827 -89.371,-14.326 -88.951,-14.719 -88.476,-15.049 -91.262,-18.415 -106.541,-20.359 -121.056,-20.371 -124.485,-17.6 -124.116,-17.366 -123.765,-17.085 -123.332,-16.63 -122.973,-16.109 -122.699,-15.533 -122.533,-14.982 -122.448,-14.408 -122.448,-13.8 -122.536,-13.22 -122.656,-12.801 -122.827,-12.384 -123.141,-11.84 -123.54,-11.349 -124.015,-10.924 -124.498,-10.609 -125.023,-10.366 -125.608,-10.195 -126.188,-10.115 -126.625,-10.112 -127.072,-10.159 -127.683,-10.307 -128.267,-10.551 -128.808,-10.887 -129.247,-11.261 -129.628,-11.697 -129.957,-12.21 -130.197,-12.745 -130.323,-13.162 -130.404,-13.605 -136.876,-13.537 -137.333,-12.756 -137.718,-11.936 -138.056,-10.989 -138.297,-10.015 -138.429,-9.115 -138.48,-8.109 ; -121.436,-14.108 -121.429,-14.302 -121.405,-14.501 -121.311,-14.888 -121.15,-15.269 -120.922,-15.627 -120.632,-15.944 -120.294,-16.207 -119.881,-16.422 -119.403,-16.564 -118.936,-16.608 -118.742,-16.6 -118.543,-16.577 -118.156,-16.483 -117.775,-16.322 -117.417,-16.093 -117.1,-15.804 -116.837,-15.466 -116.622,-15.052 -116.48,-14.575 -116.436,-14.108 -116.444,-13.913 -116.467,-13.715 -116.561,-13.327 -116.722,-12.946 -116.951,-12.588 -117.24,-12.271 -117.578,-12.009 -117.992,-11.793 -118.469,-11.652 -118.936,-11.608 -119.131,-11.615 -119.329,-11.639 -119.717,-11.733 -120.098,-11.894 -120.456,-12.122 -120.773,-12.412 -121.035,-12.75 -121.251,-13.163 -121.392,-13.641 -121.436,-14.108 ; -121.436,15.892 -121.429,15.698 -121.405,15.499 -121.311,15.112 -121.15,14.731 -120.922,14.373 -120.632,14.056 -120.294,13.793 -119.881,13.578 -119.403,13.436 -118.936,13.392 -118.742,13.4 -118.543,13.423 -118.156,13.517 -117.775,13.678 -117.417,13.907 -117.1,14.196 -116.837,14.534 -116.622,14.948 -116.48,15.425 -116.436,15.892 -116.444,16.087 -116.467,16.285 -116.561,16.673 -116.722,17.054 -116.951,17.412 -117.24,17.729 -117.578,17.991 -117.992,18.207 -118.469,18.348 -118.936,18.392 -119.131,18.385 -119.329,18.361 -119.717,18.267 -120.098,18.106 -120.456,17.878 -120.773,17.588 -121.035,17.25 -121.251,16.837 -121.392,16.359 -121.436,15.892 ; -96.436,-14.108 -96.429,-14.302 -96.405,-14.501 -96.311,-14.888 -96.15,-15.269 -95.922,-15.627 -95.632,-15.944 -95.294,-16.207 -94.881,-16.422 -94.403,-16.564 -93.936,-16.608 -93.742,-16.6 -93.543,-16.577 -93.156,-16.483 -92.775,-16.322 -92.417,-16.093 -92.1,-15.804 -91.837,-15.466 -91.622,-15.052 -91.48,-14.575 -91.436,-14.108 -91.444,-13.913 -91.467,-13.715 -91.561,-13.327 -91.722,-12.946 -91.951,-12.588 -92.24,-12.271 -92.578,-12.009 -92.992,-11.793 -93.469,-11.652 -93.936,-11.608 -94.131,-11.615 -94.329,-11.639 -94.717,-11.733 -95.098,-11.894 -95.456,-12.122 -95.773,-12.412 -96.035,-12.75 -96.251,-13.163 -96.392,-13.641 -96.436,-14.108 ; -96.436,15.892 -96.429,15.698 -96.405,15.499 -96.311,15.112 -96.15,14.731 -95.922,14.373 -95.632,14.056 -95.294,13.793 -94.881,13.578 -94.403,13.436 -93.936,13.392 -93.742,13.4 -93.543,13.423 -93.156,13.517 -92.775,13.678 -92.417,13.907 -92.1,14.196 -91.837,14.534 -91.622,14.948 -91.48,15.425 -91.436,15.892 -91.444,16.087 -91.467,16.285 -91.561,16.673 -91.722,17.054 -91.951,17.412 -92.24,17.729 -92.578,17.991 -92.992,18.207 -93.469,18.348 -93.936,18.392 -94.131,18.385 -94.329,18.361 -94.717,18.267 -95.098,18.106 -95.456,17.878 -95.773,17.588 -96.035,17.25 -96.251,16.837 -96.392,16.359 -96.436,15.892
  text ".Layer_Name" at -137.496,-107.486 h2.03

## Other copper
Top Layer:
  rectangle net GND: -78.754,-1.288 -77.557,3.784
  text ".Layer_Name" at -137.369,-94.278 h2.03
Bottom Layer:
  text ".Layer_Name" at -137.287,-96.647 h2.03

## Silkscreen, mask and mechanical layers (free items; w line width, h text height)
Top Overlay:
  drawing of 264 lines, arcs and shapes, not listed
  text "ITEAD 100007609" at -111.252,15.989 h1.27
  text "Made in a" at -115.646,-2.032 h1.27
  text "SiliconValleyGarage" at -115.646,-4.572 h3.81
  text "t" at -108.868,-12.777 h1.27
  text "=" at -107.636,-12.907 h1.27
  text "t" at -115.103,-13.04 h1.27
  text "CAL Label" at -105.196,-13.073 h1.52
  text "r" at -108.398,-13.185 h1.27
  text "r" at -114.633,-13.448 h1.27
  text "Picosecond Risetime Tester Mk2" at -117.81,-18.274 h1.78
  text "ITEAD 100007609" at -113.487,-22.733 h1.27
  text ".Layer_Name" at -137.369,-89.452 h2.03
Bottom Overlay:
  drawing of 133 lines, arcs and shapes, not listed
  text ".Layer_Name" at -137.496,-101.263 h2.03
Top Solder:
  circle w2.54: c-83.769,0.889 r4.239
  text ".Layer_Name" at -137.369,-91.865 h2.03
Bottom Solder:
  circle w2.54: c-83.769,0.889 r4.239
  text ".Layer_Name" at -137.496,-98.85 h2.03
Mechanical 1:
  text ".Layer_Name" at -137.369,-104.565 h2.03
Mechanical 2:
  drawing of 542 lines, arcs and shapes, not listed
  text "Layer Stack" at -137.369,-84.245 h2.54
  text ".Layer_Name" at -137.369,-86.785 h2.03
  text "Board Material : FR4  62 Mils (1.6mm) end thickness" at -114.509,-86.785 h2.03
  text "Number of components" at -40.849,-86.785 h2.03
  text ".Component_Count" at -15.449,-86.785 h2.03
  text "SiliconValleyGarage.com" at 58.928,-86.868 h5.08
  text "Double sided" at -114.509,-89.325 h2.03
  text "Number of holes" at -40.849,-89.325 h2.03
  text ".Hole_Count" at -15.449,-89.325 h2.03
  text "HASL finish - Lead free not required" at -114.509,-91.865 h2.03
  text "Number of pads" at -40.849,-91.865 h2.03
  text ".Pad_Count" at -15.449,-91.865 h2.03
  text "Top and bottom Liquid soldermask Blue" at -114.509,-94.405 h2.03
  text "Number of vias" at -40.849,-94.405 h2.03
  text ".Via_Count" at -15.449,-94.405 h2.03
  text "Top and bottom Liquid silkscreen White" at -114.509,-96.945 h2.03
  text "Printed" at -40.849,-99.485 h2.03
  text ".Print_Date" at -15.449,-99.485 h2.03
  text "Pulse Generator MK-II" at 40.259,-101.219 h3.81
  text ".Print_Time" at -15.449,-102.025 h2.03
  text "Scale" at -40.849,-104.565 h2.03
  text ".Print_Scale" at -15.449,-104.565 h2.03
  text "Use Keepout layer for board contour milling" at -114.554,-107.569 h2.03
  text "Drawn By : Vincent Himpe" at 40.499,-107.989 h2.03
Mechanical 3:
  drawing of 332 lines, arcs and shapes, not listed
  text ".Layer_Name" at -137.496,-107.486 h2.03

## Text inside footprints (layer, text, board x,y; h text height)
K1: Top Overlay "MEM PROT. DEV." at -113.131,7.645 h1.02; Top Overlay "BU2032-HD-G" at -112.242,9.754 h1.02; Top Overlay "CR2032" at -110.159,11.76 h1.02; Top Overlay "+" at -118.16,8.687 h1.02; Top Overlay "-" at -95.681,8.636 h1.02